# Altium PCB 3轴5.2-PCB-V3.3-2023.10.27.PcbDoc (part 2 of 2)
Units mm, origin at the board's own origin, x right, y up, seen from the top; angles counter-clockwise.
Board outline 152.4 x 101.6 mm, 2 copper layers (Top Layer, Bottom Layer); 198 components, 135 nets, 711 pads, 633 vias.
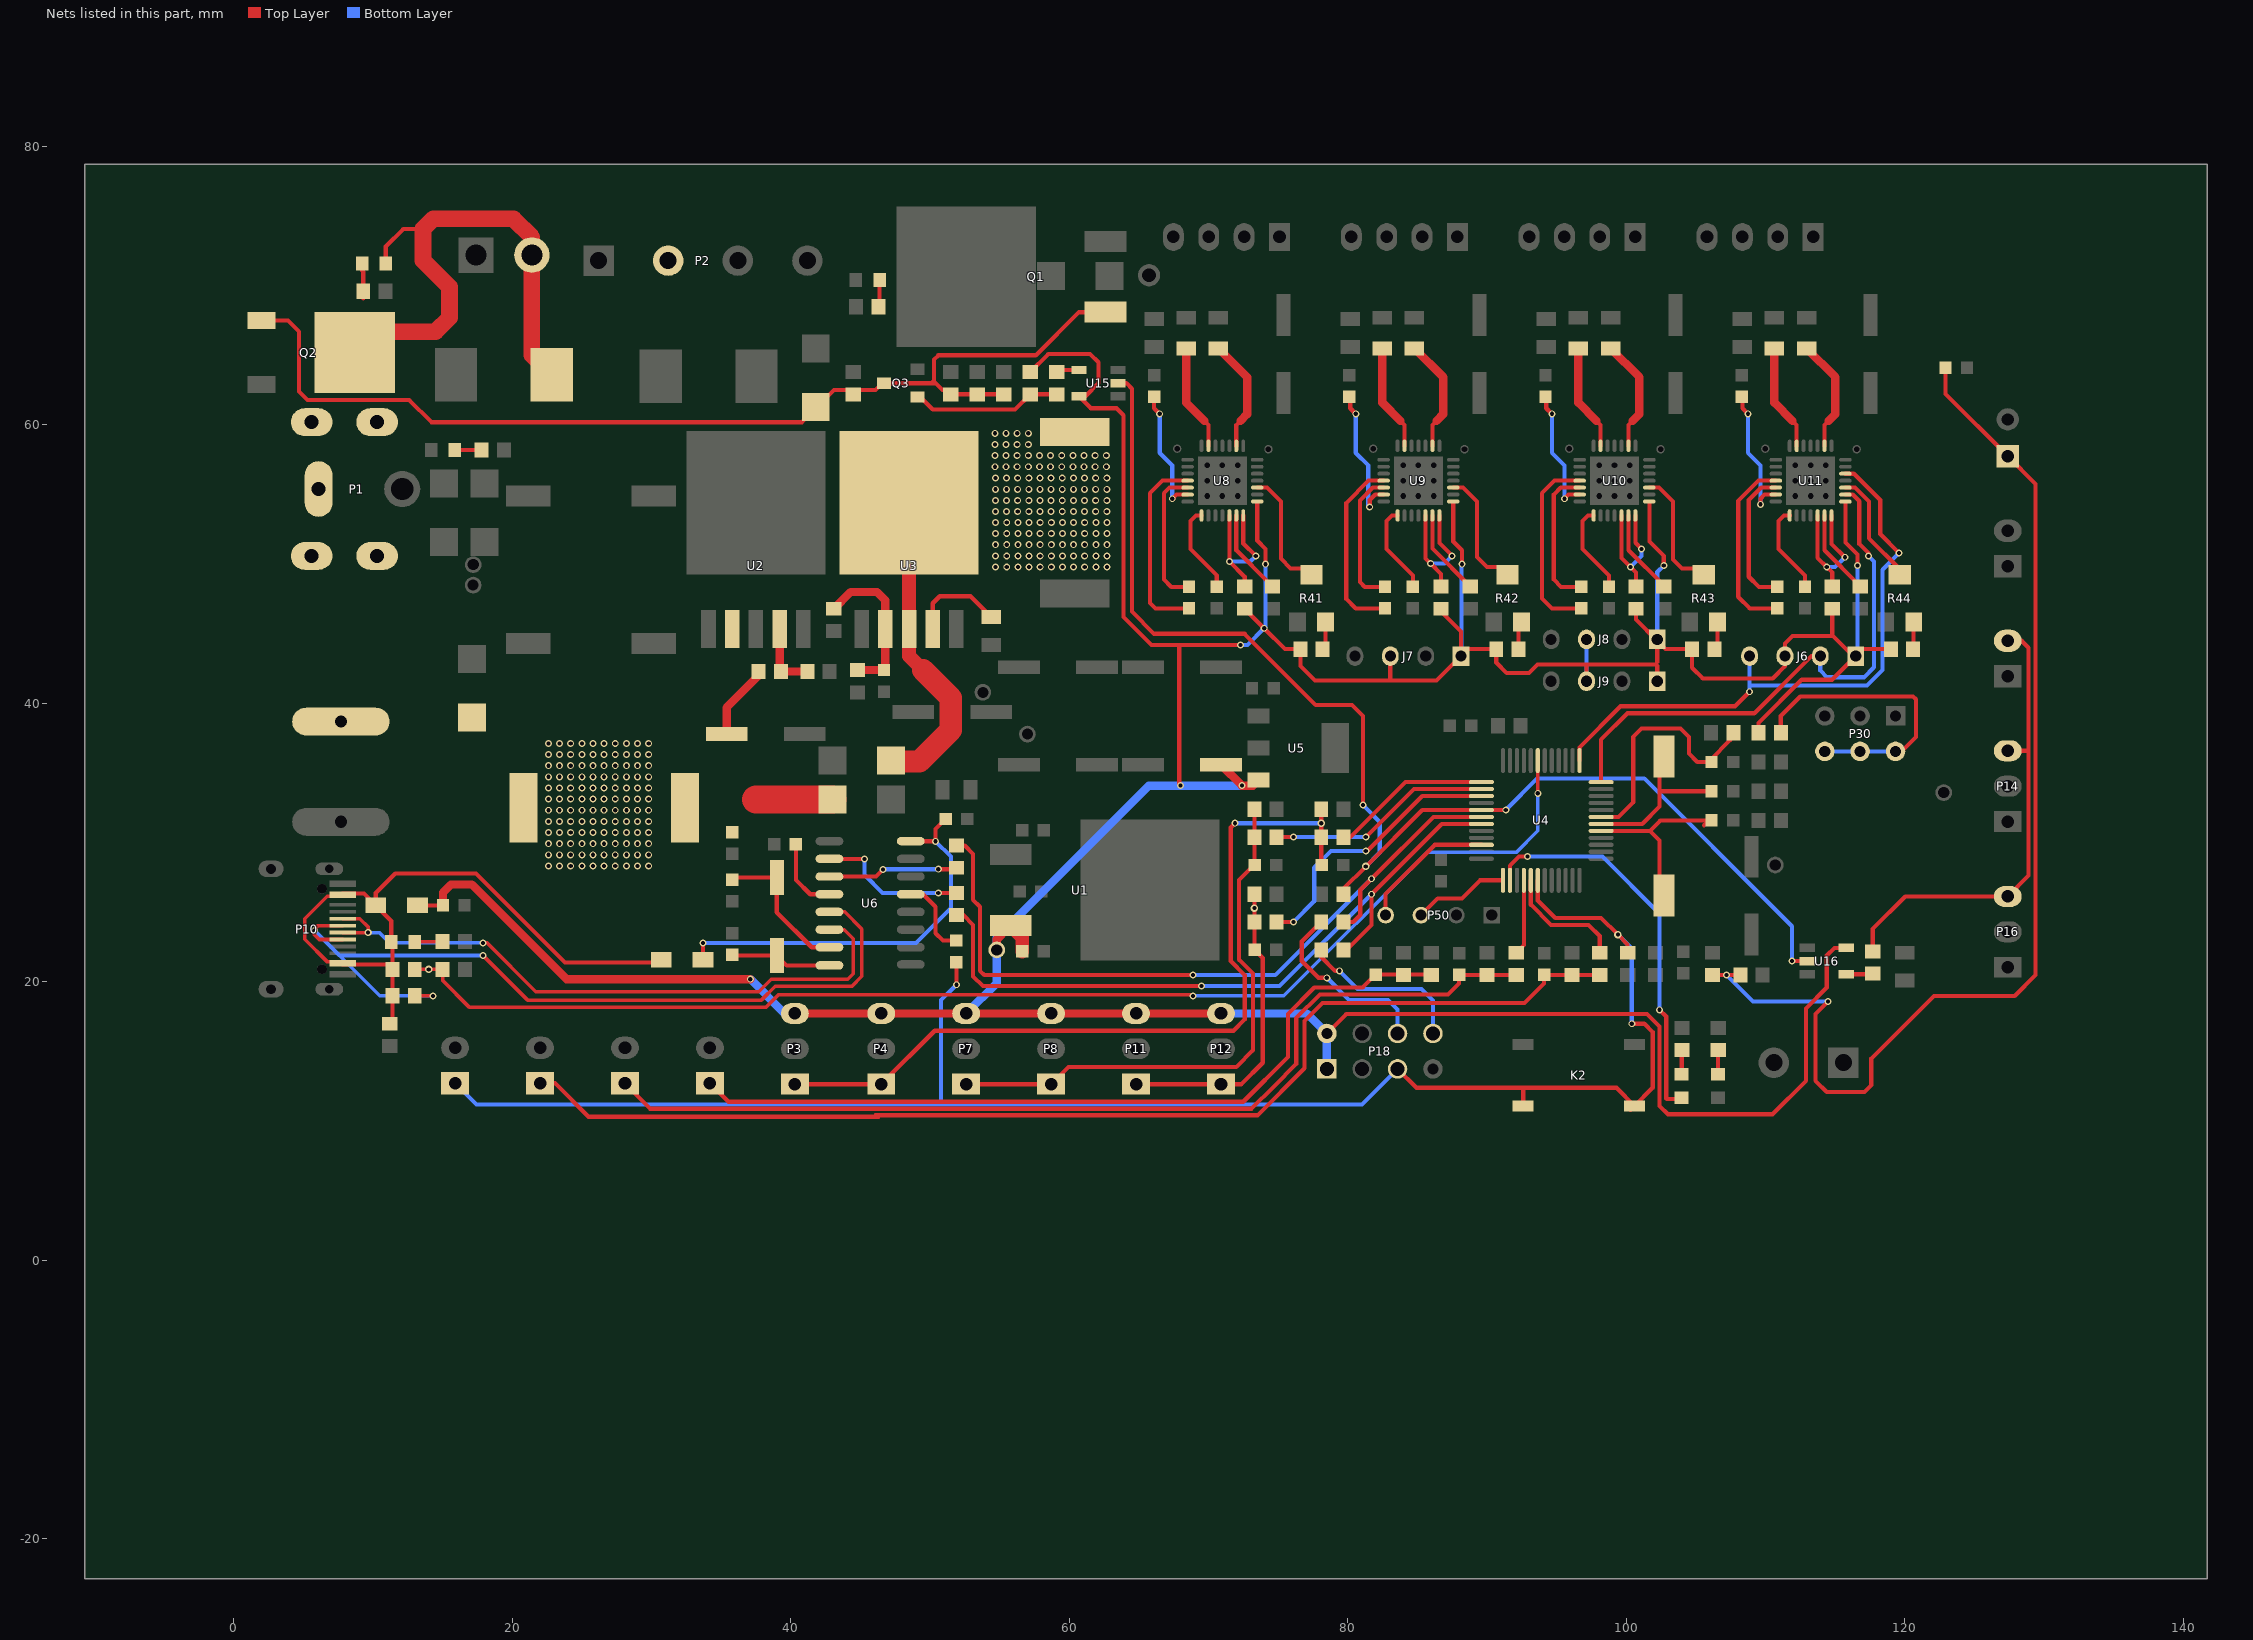
[diagram p2: the nets of this part, all layers, seen from the top]

## Via types
v1: diameter 0.5, hole 0.3, Top Layer to Bottom Layer, 619 vias
v2: diameter 0.53, hole 0.3, Top Layer to Bottom Layer, 14 vias

## Nets (pads, with @x,y where several pads share a name; then routed paths per layer and width w, separated by ;. In a path a pad name is that pad's centre, name@x,y a point inside that pad or via, vN(x,y) a via of type N, cw(c..) or ccw(c..) an arc to the next point about the centre after c; other vN are vias at no path point) (continued)
MZ_DIR: J6.4 U4.13 U11.19 | length 44.5
  Top Layer w0.3: U4.13@96.65,35.9 96.638,35.912 96.638,36.838 99.6,39.8 107.82,39.8 v1(108.86,40.84) ; U11.19@115.74,56.5 116.34,56.5 118.24,54.6 ; 118.24,54 118.24,54.6 ; v1(119.6,50.8) 118.24,52.16 118.24,54.6
  Bottom Layer w0.3: v1(108.86,40.84) 108.86,41.3 ; J6.4@108.86,43.4 108.86,41.3 ; v1(119.6,50.8) 118.4,49.6 118.4,42.4 117.3,41.3 108.86,41.3
MZ_STEP: J6.2 U4.12 U11.16 | length 40.8
  Top Layer w0.3: U4.12@98.2,34.35 98.2,37.4 100.1,39.3 109.2,39.3 113.3,43.4 J6.2@113.94,43.4 ; U11.16@115.74,54.999 116.265,54.999 116.74,54.524 ; 116.74,54 116.74,54.524 ; v1(117.4,50.6) 117.4,50.8 116.74,51.46 116.74,54.524
  Bottom Layer w0.3: J6.2@113.94,43.4 113.94,42.36 114.424,41.876 117.076,41.876 117.804,42.604 117.804,50.196 v1(117.4,50.6)
NetC4_1: C4.1 U3.4 | length 6.7
  Top Layer w0.3: U3.4@50.2,45.349 50.2,47.2 50.7,47.7 52.9,47.7 C4.1@54.3,46.3
NetC10_1: C10.1 C14.2 D7.1 L2.2 R6.2 | length 11
  Top Layer w0.6: C10.1@35.4,37.8 35.4,39.7 37.7,42 R6.2@37.7,42.3
  Top Layer w2: 37.5,33.1 D7.1@43,33.1
NetC17_2: C17.2 P3.1 P4.1 R11.1 R60.2 | length 59.1
  Top Layer w0.3: P3.1@40.3,12.66 P4.1@46.5,12.66 50.34,16.5 71.8,16.5 72.6,17.3 72.6,20.5 71.6,21.5 71.6,31.1 v1(71.9,31.4) ; R11.1@78.1,32.4 v2(78.1,31.4) 78.1,28.425 C17.2@78.125,28.4
  Bottom Layer w0.3: v1(71.9,31.4) v2(78.1,31.4)
NetC19_2: C19.2 D14.2 U6.16 | length 29
  Top Layer w0.3: D14.2@33.7,21.6 v1(33.7,22.8) ; U6.16@48.621,30.11 48.631,30.1 v1(50.4,30.1) 50.4,30.975 C19.2@51.125,31.7
  Bottom Layer w0.3: v1(33.7,22.8) 49,22.8 51.5,25.3 51.5,29 v1(50.4,30.1)
NetC20_2: C20.2 P7.1 P8.1 R14.1 R61.2 | length 39.8
  Top Layer w0.3: P7.1@52.6,12.66 P8.1@58.7,12.66 59.94,13.9 72,13.9 73.2,15.1 73.2,20.6 72.2,21.6 72.2,27.325 C20.2@73.3,28.425 ; R14.1@73.3,32.4 R61.2@73.3,30.4 C20.2@73.3,28.425 ; C20.2@73.325,28.4 C20.2@73.3,28.425
NetC23_1: C23.1 U6.4 | length 5.4
  Top Layer w0.3: C23.1@40.375,29.9 40.375,27.325 41.4,26.3 U6.4@42.779,26.3
NetC25_2: C25.2 P23.1 R90.1 R91.2 | length 83.2
  Top Layer w0.3: R91.2@106.2,20.5 v1(107.2,20.5) R90.1@108.2,20.5 ; v1(114.5,18.6) 113.6,17.7 113.6,12.9 114.4,12.1 117.1,12.1 117.6,12.6 117.6,14.5 122.1,19 127.9,19 129.4,20.5 129.4,55.76 P23.1@127.4,57.76 122.925,62.235 C25.2@122.925,64.1
  Bottom Layer w0.3: v1(107.2,20.5) 109.1,18.6 v1(114.5,18.6)
NetC26_2: C26.2 P11.1 P12.1 R19.1 R62.2 | length 22.1
  Top Layer w0.3: P11.1@64.8,12.66 P12.1@70.9,12.66 72.36,12.66 73.9,14.2 73.9,21.725 C26.2@73.325,22.3 73.3,22.325 R62.2@73.3,24.3 R19.1@73.3,26.3
  other v2: 73.3,25.3
NetC27_1: C27.1 U6.13 | length 5.8
  Top Layer w0.3: U6.13@48.621,26.3 49.5,26.3 50.4,25.4 50.4,23.5 50.925,22.975 C27.1@51.9,22.975
NetC38_1: C38.1 U8.4 | length 13.9
  Top Layer w0.3: U8.4@68.5,56 66.7,56 65.8,55.1 65.8,47.213 66.187,46.825 C38.1@68.6,46.825
NetC38_2: C38.2 U8.5 | length 10.1
  Top Layer w0.3: U8.5@68.5,55.5 67.2,55.5 66.8,55.1 66.8,48.9 67.325,48.375 C38.2@68.6,48.375
NetC39_1: C39.1 U9.4 | length 13.3
  Top Layer w0.3: U9.4@82.58,56 81.5,56 79.9,54.4 79.9,47.5 80.575,46.825 C39.1@82.68,46.825
NetC39_2: C39.2 U9.5 | length 9.9
  Top Layer w0.3: U9.5@82.58,55.5 81.8,55.5 80.88,54.58 80.88,48.72 81.225,48.375 C39.2@82.68,48.375
NetC40_1: C40.1 U10.4 | length 14
  Top Layer w0.3: 94.96,46.825 94.675,46.825 ; U10.4@96.66,56 94.86,56 93.96,55.1 93.96,47.54 94.675,46.825 ; C40.1@96.76,46.825 94.675,46.825
NetC40_2: C40.2 U10.5 | length 10.3
  Top Layer w0.3: U10.5@96.66,55.5 95.3,55.5 94.8,55 94.8,48.9 95.325,48.375 C40.2@96.76,48.375
NetC41_1: C41.1 U11.4 | length 13.3
  Top Layer w0.3: U11.4@110.74,56 109.5,56 108.04,54.54 108.04,47.66 108.875,46.825 C41.1@110.84,46.825
NetC41_2: C41.2 U11.5 | length 10.2
  Top Layer w0.3: U11.5@110.74,55.5 109.7,55.5 108.8,54.6 108.8,49.9 108.8,49.1 109.525,48.375 C41.2@110.84,48.375
NetC42_1: C42.1 U8.6 | length 9.3
  Top Layer w0.3: C42.1@66.1,62.125 66.1,61.2 v1(66.5,60.8) ; v1@67.5,54.7 v1(67.4,54.7) 67.699,54.999 U8.6@68.5,54.999
  Bottom Layer w0.3: v1(66.5,60.8) 66.5,58 67.4,57.1 v1(67.4,54.7)
NetC43_1: C43.1 U9.6 | length 10.5
  Top Layer w0.3: C43.1@80.18,62.125 80.18,61.2 v1(80.58,60.8) ; v1(81.58,54.1) 81.58,54.604 81.975,54.999 U9.6@82.58,54.999
  Bottom Layer w0.3: v1(80.58,60.8) 80.58,58 81.48,57.1 81.48,54.9 ; 81.48,54.7 81.48,54.9 ; v1(81.58,54.1) 81.48,54.2 81.48,54.9
NetC44_1: C44.1 U10.6 | length 9.3
  Top Layer w0.3: C44.1@94.26,62.125 94.26,61.2 v1(94.66,60.8) ; v1@95.66,54.7 v1(95.56,54.7) 95.859,54.999 U10.6@96.66,54.999
  Bottom Layer w0.3: v1(94.66,60.8) 94.66,58 95.56,57.1 v1(95.56,54.7)
NetC45_1: C45.1 U11.6 | length 10
  Top Layer w0.3: C45.1@108.34,62.125 108.34,61.2 v1(108.74,60.8) ; v1(109.64,54.3) 109.64,54.7 109.939,54.999 U11.6@110.74,54.999
  Bottom Layer w0.3: v1(108.74,60.8) 108.74,58 109.64,57.1 v1(109.64,54.3)
NetC46_1: C46.1 U8.8 | length 6.5
  Top Layer w0.3: U8.8@69.499,53.5 69.1,53.5 68.7,53.1 68.7,51.09 70.6,49.19 C46.1@70.6,48.375
NetC47_1: C47.1 U9.8 | length 6.4
  Top Layer w0.3: U9.8@83.579,53.5 83.18,53.5 82.78,53.1 82.78,51.09 84.68,49.19 ; C47.1@84.68,48.375 84.68,49.074
NetC48_1: C48.1 U10.8 | length 6.5
  Top Layer w0.3: U10.8@97.659,53.5 97.26,53.5 96.86,53.1 96.86,51.09 98.76,49.19 98.76,48.9 C48.1@98.76,48.375
NetC49_1: C49.1 U11.8 | length 6.4
  Top Layer w0.3: U11.8@111.739,53.5 111.34,53.5 110.94,53.1 110.94,51.09 112.84,49.19 ; C49.1@112.84,48.375 112.84,49.154
NetC54_1: C54.1 U6.7 Y1.2 | length 10.6
  Top Layer w0.3: C54.1@35.951,27.5 Y1.2@39,27.5 ; Y1.2@38.849,27.349 Y1.2@39,27.5 ; U6.7@42.779,22.49 41.51,22.49 39,25 Y1.2@39,27.5
NetC55_1: C55.1 U6.8 Y1.1 | length 7.3
  Top Layer w0.3: C55.1@35.8,22.025 35.925,21.9 Y1.1@39,21.9 39.71,21.19 U6.8@42.779,21.19
NetC56_1: C56.1 R1.1 R7.2 U3.2 | length 11.4
  Top Layer w0.6: R7.2@43.1,46.8 44.3,48 46.2,48 46.8,47.4 U3.2@46.8,45.349 46.8,42.5 C56.1@46.7,42.4 R1.1@44.8,42.4
NetC60_2: C60.2 P6.1 R63.2 R66.1 | length 84
  Top Layer w0.3: P6.1@22,12.73 23.07,12.73 25.478,10.322 46,10.322 ; 46.3,10.322 46,10.322 ; R63.2@98.1,20.5 R66.1@96.1,20.5 94.125,20.5 C60.2@94.1,20.525 94.1,19.9 92.7,18.5 78.2,18.5 76.9,17.2 76.9,13.8 73.522,10.422 46.1,10.422 46,10.322
NetC61_2: C61.2 P9.1 R64.2 R67.1 | length 71.1
  Top Layer w0.3: P9.1@28.1,12.73 28.1,12.7 29.9,10.9 73.1,10.9 74.7,12.5 76.3,14.1 76.3,17.4 78,19.1 87.2,19.1 88,19.9 C61.2@88,20.525 88.025,20.5 R67.1@90,20.5 R64.2@92.1,20.5
NetC62_2: C62.2 P13.1 R65.2 R68.1 | length 58
  Top Layer w0.3: P13.1@34.2,12.73 35.53,11.4 72.5,11.4 75.7,14.6 75.7,17.7 77.6,19.6 79.2,19.6 81.075,19.6 C62.2@82,20.525 85.975,20.525 R65.2@86,20.5
NetD4_1: D4.1 R3.2 | length 1.8
  Top Layer w0.3: D4.1@106.583,13.284 106.6,13.301 R3.2@106.6,15.1
NetD5_2: D5.2 L2.1 U2.2
  other v1: 22.6,28.332 23.4,28.332 24.2,28.332 25,28.332 25.8,28.332 26.6,28.332 27.4,28.332 28.2,28.332 29,28.332 29.8,28.332 22.6,29.132 23.4,29.132 24.2,29.132 25,29.132 25.8,29.132 26.6,29.132 27.4,29.132 28.2,29.132 29,29.132 29.8,29.132 22.6,29.932 23.4,29.932 24.2,29.932 25,29.932 25.8,29.932 26.6,29.932 27.4,29.932 28.2,29.932 29,29.932 29.8,29.932 22.6,30.732 23.4,30.732 24.2,30.732 25,30.732 25.8,30.732 26.6,30.732 27.4,30.732 28.2,30.732 29,30.732 29.8,30.732 22.6,31.532 23.4,31.532 24.2,31.532 25,31.532 25.8,31.532 26.6,31.532 27.4,31.532 28.2,31.532 29,31.532 29.8,31.532 22.6,32.332 23.4,32.332 24.2,32.332 25,32.332 25.8,32.332 26.6,32.332 27.4,32.332 28.2,32.332 29,32.332 29.8,32.332 22.6,33.132 23.4,33.132 24.2,33.132 25,33.132 25.8,33.132 26.6,33.132 27.4,33.132 28.2,33.132 29,33.132 29.8,33.132 22.6,33.932 23.4,33.932 24.2,33.932 25,33.932 25.8,33.932 26.6,33.932 27.4,33.932 28.2,33.932 29,33.932 29.8,33.932 22.6,34.732 23.4,34.732 24.2,34.732 25,34.732 25.8,34.732 26.6,34.732 27.4,34.732 28.2,34.732 29,34.732 29.8,34.732 22.6,35.532 23.4,35.532 24.2,35.532 25,35.532 25.8,35.532 26.6,35.532 27.4,35.532 28.2,35.532 29,35.532 29.8,35.532 22.6,36.332 23.4,36.332 24.2,36.332 25,36.332 25.8,36.332 26.6,36.332 27.4,36.332 28.2,36.332 29,36.332 29.8,36.332 22.6,37.132 23.4,37.132 24.2,37.132 25,37.132 25.8,37.132 26.6,37.132 27.4,37.132 28.2,37.132 29,37.132 29.8,37.132
NetD6_2: D6.2 L1.1 U3.3 | length 18.5
  Top Layer w1: U3.3@48.5,50.232 U3.3@48.5,45.349 48.5,43.4 49.5,42.4
  Top Layer w1.6: D6.2@47.3,35.835 49.235,35.835 51.5,38.1 51.5,40.4 49.5,42.4
  other v1: 54.714,49.8 55.514,49.8 56.314,49.8 57.114,49.8 57.914,49.8 58.714,49.8 59.514,49.8 60.314,49.8 61.114,49.8 61.914,49.8 62.714,49.8 54.714,50.6 55.514,50.6 56.314,50.6 57.114,50.6 57.914,50.6 58.714,50.6 59.514,50.6 60.314,50.6 61.114,50.6 61.914,50.6 62.714,50.6 54.714,51.4 55.514,51.4 56.314,51.4 57.114,51.4 57.914,51.4 58.714,51.4 59.514,51.4 60.314,51.4 61.114,51.4 61.914,51.4 62.714,51.4 54.714,52.2 55.514,52.2 56.314,52.2 57.114,52.2 57.914,52.2 58.714,52.2 59.514,52.2 60.314,52.2 61.114,52.2 61.914,52.2 62.714,52.2 54.714,53 55.514,53 56.314,53 57.114,53 57.914,53 58.714,53 59.514,53 60.314,53 61.114,53 61.914,53 62.714,53 54.7,53.782 55.5,53.782 56.3,53.782 57.1,53.782 57.9,53.782 58.7,53.782 59.5,53.782 60.3,53.782 61.1,53.782 61.9,53.782 62.7,53.782 54.7,54.582 55.5,54.582 56.3,54.582 57.1,54.582 57.9,54.582 58.7,54.582 59.5,54.582 60.3,54.582 61.1,54.582 61.9,54.582 62.7,54.582 54.7,55.382 55.5,55.382 56.3,55.382 57.1,55.382 57.9,55.382 58.7,55.382 59.5,55.382 60.3,55.382 61.1,55.382 61.9,55.382 62.7,55.382 54.7,56.182 55.5,56.182 56.3,56.182 57.1,56.182 57.9,56.182 58.7,56.182 59.5,56.182 60.3,56.182 61.1,56.182 61.9,56.182 62.7,56.182 54.664,57 55.464,57 56.264,57 57.064,57 57.864,57 58.664,57 59.464,57 60.264,57 61.064,57 61.864,57 62.664,57 54.664,57.8 55.464,57.8 56.264,57.8 57.064,57.8 57.864,57.8 58.664,57.8 59.464,57.8 60.264,57.8 61.064,57.8 61.864,57.8 62.664,57.8 54.664,58.6 55.464,58.6 56.264,58.6 57.064,58.6 54.664,59.4 55.464,59.4 56.264,59.4 57.064,59.4
NetD10_1: D10.1 R4.1 | length 1.9
  Top Layer w0.3: D10.1@15.884,58.217 15.901,58.2 R4.1@17.8,58.2
NetD12_1: D12.1 R71.1 | length 1.8
  Top Layer w0.3: D12.1@103.983,13.284 103.983,15.083 R71.1@104,15.1
NetD12_2: D12.2 U4.38 | length 28.4
  Top Layer w0.3: U4.38@91.65,27.3 91.65,28.35 92.3,29 v1(92.9,29) ; v1(102.4,18) 102.878,17.522 102.878,11.622 102.916,11.584 D12.2@103.983,11.584
  Bottom Layer w0.3: v1(92.9,29) 98.3,29 102.4,24.9 v1(102.4,18)
NetD13_2: D13.2 R76.2 | length 2
  Top Layer w0.254: D13.2@13.016,22.883 13.033,22.9 R76.2@15,22.9
NetD15_1: D15.1 R21.2 | length 2
  Top Layer w0.3: R21.2@46.3,68.5 46.384,68.584 D15.1@46.384,70.417
NetD16_1: D16.1 R58.2 | length 2
  Top Layer w0.3: D16.1@9.216,71.083 9.3,70.999 R58.2@9.3,69.1
NetD16_2: D16.2 DZ1.1 P17.2 Q2.2 | length 43.3
  Top Layer w0.3: D16.2@10.916,71.583 10.916,72.816 12.18,74.08 13.6,74.08
  Top Layer w1: 21.413,68.867 P17.2@21.413,72.2 P17.2@21.413,72.4
  Top Layer w1.2: Q2.2@8.7,64.6 10.8,66.7 14.5,66.7 15.5,67.7 15.5,69.9 13.6,71.8 13.6,74.08 14.32,74.8 20.1,74.8 21.413,73.487 P17.2@21.413,72.2 21.413,65.022 DZ1.1@22.835,63.6 ; Q2.2@8.7,65 Q2.2@8.7,65.961
NetDZ4_2: DZ4.2 Q1.1 Q2.1 Q3.2 R27.1 R57.1 R77.1 R78.1 | length 77.7
  Top Layer w0.3: Q2.1@2,67.5 3.9,67.5 4.7,66.7 4.7,62.4 5.3,61.8 12.6,61.8 14.2,60.2 34.4,60.2 ; 36.4,60.2 34.4,60.2 ; R27.1@51.5,62.2 R77.1@53.4,62.2 R78.1@55.3,62.2 ; R27.1@51.5,62.5 50.9,62.5 50.4,63 50.1,63 ; Q1.1@62.6,68.1 60.7,68.1 57.6,65 50.6,65 50.3,64.7 50.3,63.2 50.1,63 ; 34.4,60.2 40.8,60.2 41.9,61.3 43.1,62.5 44.7,62.5 46.1,62.5 46.6,63 46.9,63 50.1,63
NetK1_1: K1.1 P1.2 P1.3 P1.4 P1.5 P1.6 P2.2 | length 0.7
  Bottom Layer w0.3: P2.2@31.2,71.1 P2.2@31.2,71.8
NetP18_6: P18.6 R22.2 | length 13.4
  Top Layer w0.3: R22.2@78.1,24.3 76.7,22.9 76.7,21.5 77.9,20.3 v1(78.5,20.3)
  Bottom Layer w0.3: v1(78.5,20.3) 80.1,18.7 82.9,18.7 83.58,18.02 P18.6@83.58,16.3
NetP18_8: P18.8 R25.2 | length 12.2
  Top Layer w0.3: R25.2@78.1,22.3 78.1,21.8 79.1,20.8 v1(79.4,20.8)
  Bottom Layer w0.3: v1(79.4,20.8) 80.7,19.5 85.3,19.5 86.12,18.68 P18.8@86.12,16.3
NetP30_2: P30.2 P30.4 P30.6 R52.2 | length 21.2
  Top Layer w0.3: R52.2@111.1,37.9 111.1,38.1 111.1,39.1 112.5,40.5 114.6,40.5 120.6,40.5 120.8,40.3 120.8,37.6 119.76,36.56 P30.2@119.34,36.56
  Bottom Layer w0.3: P30.6@114.26,36.56 P30.4@116.8,36.56 P30.2@119.34,36.56
NetQ3_1: Q3.1 R80.2 R81.1 | length 13.6
  Top Layer w0.3: Q3.1@49.3,62 50.2,61.1 ; 53.2,61.1 50.2,61.1 ; R80.2@59.1,62.2 R81.1@57.2,62.2 56.1,61.1 50.2,61.1
NetR6_1: R6.1 R8.2 U2.4 | length 5
  Top Layer w0.6: U2.4@39.2,45.349 39.2,42.4 R6.1@39.3,42.3 R8.2@41.2,42.3
NetR15_1: R15.1 U6.2 | length 10.8
  Top Layer w0.3: U6.2@42.779,28.84 v1(45.3,28.84) ; v1(50.6,26.4) R15.1@51.9,26.4
  Bottom Layer w0.3: v1(45.3,28.84) 45.3,27.7 46.6,26.4 v1(50.6,26.4)
NetR16_1: R16.1 U6.3 | length 9.4
  Top Layer w0.3: U6.3@42.779,27.57 46.13,27.57 v1(46.638,28.078) ; v1(50.6,28.1) 51.8,28.1 R16.1@51.9,28.2
  Bottom Layer w0.3: v1(46.638,28.078) 46.66,28.1 v1(50.6,28.1)
NetR29_1: R29.1 U8.27 | length 7.7
  Top Layer w0.3: 69.7,60.3 69.999,60.001 U8.27@69.999,58.5
  Top Layer w0.6: R29.1@68.4,65.5 68.4,61.599 69.699,60.3
NetR30_2: R30.2 U8.23 | length 8.2
  Top Layer w0.3: U8.23@72.001,58.5 72.001,60.001 72.3,60.3
  Top Layer w0.6: R30.2@70.713,65.5 72.781,63.432 72.781,60.781 72.3,60.3
NetR31_1: R31.1 U9.27 | length 7.7
  Top Layer w0.3: 83.78,60.3 84.079,60.001 U9.27@84.079,58.5
  Top Layer w0.6: R31.1@82.48,65.5 82.48,61.599 83.779,60.3
NetR32_2: R32.2 U9.23 | length 8.2
  Top Layer w0.3: U9.23@86.081,58.5 86.081,60.001 86.38,60.3
  Top Layer w0.6: R32.2@84.793,65.5 86.861,63.432 86.861,60.781 86.38,60.3
NetR33_1: R33.1 U10.27 | length 7.7
  Top Layer w0.3: 97.86,60.3 98.159,60.001 U10.27@98.159,58.5
  Top Layer w0.6: R33.1@96.56,65.5 96.56,61.599 97.859,60.3
NetR34_2: R34.2 U10.23 | length 8.2
  Top Layer w0.3: U10.23@100.161,58.5 100.161,60.001 100.46,60.3
  Top Layer w0.6: R34.2@98.873,65.5 100.941,63.432 100.941,60.781 100.46,60.3
NetR35_1: R35.1 U11.27 | length 7.7
  Top Layer w0.3: 111.94,60.3 112.239,60.001 U11.27@112.239,58.5
  Top Layer w0.6: R35.1@110.64,65.5 110.64,61.599 111.939,60.3
NetR36_2: R36.2 U11.23 | length 8.2
  Top Layer w0.3: U11.23@114.241,58.5 114.241,60.001 114.54,60.3
  Top Layer w0.6: R36.2@112.953,65.5 115.021,63.432 115.021,60.781 114.54,60.3
NetR37_1: R37.1 R41.3 | length 2
  Top Layer w0.3: R37.1@78.2,43.9 78.4,44.1 R41.3@78.4,45.85
NetR38_1: R38.1 R42.3 | length 2
  Top Layer w0.3: R38.1@92.267,43.9 92.267,45.637 R42.3@92.48,45.85
NetR39_1: R39.1 R43.3 | length 2
  Top Layer w0.3: R39.1@106.333,43.9 106.56,44.127 R43.3@106.56,45.85
NetR40_1: R40.1 R44.3 | length 2
  Top Layer w0.3: R40.1@120.4,43.9 120.64,44.14 R44.3@120.64,45.85
NetR41_2: R41.2 U8.17 | length 8.9
  Top Layer w0.3: U8.17@73.5,55.5 74.2,55.5 75.2,54.5 75.2,50.4 75.9,49.7 76.95,49.7 R41.2@77.4,49.25
NetR42_2: R42.2 U9.17 | length 8.8
  Top Layer w0.3: U9.17@87.58,55.5 88.28,55.5 89.28,54.5 89.28,50.52 90,49.8 90.93,49.8 R42.2@91.48,49.25
NetR43_2: R43.2 U10.17 | length 9.2
  Top Layer w0.3: U10.17@101.66,55.5 102.36,55.5 103.36,54.5 103.36,53.3 103.36,50.34 104,49.7 105.56,49.7 R43.2@105.56,49.25
NetR44_2: R44.2 U11.17 | length 8.3
  Top Layer w0.3: U11.17@115.74,55.5 116.44,55.5 117.44,54.5 117.44,54.2 117.44,51.86 119.64,49.66 R44.2@119.64,49.25
NetR45_2: R45.2 U8.12 U8.14 | length 10.9
  Top Layer w0.3: U8.12@71.5,53.5 v1(71.5,50.2) 72.6,49.1 R45.2@72.6,48.4 ; U8.14@72.501,53.5 72.501,51.499 v1(73.4,50.6)
  Bottom Layer w0.3: v1(71.5,50.2) 73,50.2 v1(73.4,50.6)
NetR46_2: R46.2 U9.12 U9.14 | length 10.3
  Top Layer w0.3: U9.12@85.58,53.5 85.58,50.42 v1(85.96,50.04) 86.7,49.3 R46.2@86.7,48.4 ; U9.14@86.581,53.5 86.581,51.519 87.3,50.8
  Bottom Layer w0.3: v1(85.96,50.04) 86.94,50.04 v1(87.5,50.6)
NetR47_2: R47.2 U10.12 U10.14 | length 9.7
  Top Layer w0.3: U10.12@99.66,53.5 99.66,50.44 v1(100.3,49.8) 100.7,49.4 R47.2@100.7,48.4 ; U10.14@100.661,53.5 100.661,51.539 v1(101.1,51.1)
  Bottom Layer w0.3: v1(100.3,49.8) 101.1,50.6 v1(101.1,51.1)
NetR48_2: R48.2 U11.12 U11.14 | length 10.5
  Top Layer w0.3: U11.12@113.74,53.5 113.74,50.46 v1(114.4,49.8) 114.8,49.4 R48.2@114.8,48.4 ; U11.14@114.741,53.5 114.741,51.459 v1(115.7,50.5)
  Bottom Layer w0.3: v1(114.4,49.8) 115,49.8 v1(115.7,50.5)
NetR53_2: R53.2 U8.13 | length 6.2
  Top Layer w0.3: U8.13@72.001,53.5 72.001,50.999 74.35,48.65 R53.2@74.6,48.4
NetR54_2: R54.2 U9.13 | length 6.2
  Top Layer w0.3: U9.13@86.081,53.5 86.081,51.119 R54.2@88.8,48.4
NetR55_2: R55.2 U10.13 | length 6.2
  Top Layer w0.3: U10.13@100.161,53.5 100.161,50.999 102.7,48.46 R55.2@102.7,48.4
NetR56_2: R56.2 U11.13 | length 6.2
  Top Layer w0.3: U11.13@114.241,53.5 114.241,50.999 116.8,48.44 R56.2@116.8,48.4
NetR59_1: R59.1 U16.4 | length 1.9
  Top Layer w0.3: U16.4@115.8,20.55 117.65,20.55 R59.1@117.7,20.6
NetR80_1: R80.1 U15.4 | length 1.7
  Top Layer w0.3: R80.1@59.1,63.8 59.25,63.95 U15.4@60.7,63.95
NRST: C102.2 R104.2 U4.7 | length 17.6
  Top Layer w0.3: U4.7@98.2,31.85 99.45,31.85 100.5,32.9 100.5,37.6 101.1,38.2 103.9,38.2 104.5,37.6 104.5,36.4 105.1,35.8 C102.2@106.125,35.8 ; C102.2@106.013,35.913 107.5,37.4 R104.2@107.5,37.9
PROBE: R63.1 U4.41 | length 8.8
  Top Layer w0.3: U4.41@93.15,27.3 93.15,25.55 94.6,24.1 97.3,24.1 98.1,23.3 R63.1@98.1,22.1
PWM: P14.3 P16.3 P25.2 R59.2 | length 34
  Top Layer w0.3: R59.2@117.7,22.2 117.7,23.8 120.04,26.14 P16.3@127.4,26.14 128.9,27.64 128.9,36.6 ; P14.3@127.4,36.6 128.9,36.6 ; P25.2@127.4,44.5 128.4,44.5 128.9,44 128.9,36.6
RST: C27.2 K2.1 K2.3 P5.1 P18.5 R72.2 U4.42 | length 124.1
  Top Layer w0.3: v1(51.9,19.8) C27.2@51.9,21.425 ; P18.5@83.58,13.76 84.94,12.4 92.7,12.4 ; K2.3@92.6,11.1 92.6,12.3 92.7,12.4 ; U4.42@93.65,27.3 93.65,25.85 94.9,24.6 98.2,24.6 v2(99.4,23.4) 100.1,22.7 R72.2@100.1,22.1 ; K2.1@100.3,10.8 K2.1@100.6,11.1 ; v1(100.4,17) 101.3,17 101.9,16.4 101.9,12.4 K2.1@100.6,11.1 ; 92.7,12.4 99.3,12.4 K2.1@100.6,11.1
  Bottom Layer w0.3: P5.1@15.9,12.73 17.43,11.2 50.8,11.2 ; v1(51.9,19.8) 50.8,18.7 50.8,11.2 ; P18.5@83.58,13.76 81.02,11.2 50.8,11.2 ; v2(99.4,23.4) 100.4,22.4 v1(100.4,17)
RUN: R64.1 U4.40 | length 5.4
  Top Layer w0.3: R64.1@92.1,22.1 92.65,22.65 U4.40@92.65,27.3
RXD: R15.2 R25.1 U4.31 | length 51.8
  Top Layer w0.3: R15.2@51.9,24.8 52.4,24.8 53.1,24.1 53.1,20.4 53.8,19.7 v1(69.5,19.7) ; R25.1@79.7,22.3 79.9,22.3 81.7,24.1 v1(81.7,26.3) 86.75,31.35 U4.31@89.6,31.35
  Bottom Layer w0.3: v1(69.5,19.7) 75.1,19.7 v1(81.7,26.3)
SPINDLE_PWM: R70.2 U4.29 U15.2 U16.2 | length 92.4
  Top Layer w0.3: U15.2@63.5,63 64.1,63 64.5,62.6 64.5,46.6 66.1,45 72.6,45 77.7,39.9 80.3,39.9 81.1,39.1 v1(81.1,32.7) ; R70.2@79.7,26.3 79.7,26.7 v2(81.3,28.3) 85.35,32.35 U4.29@89.6,32.35 v1(91.35,32.35) ; v1(111.9,21.5) U16.2@113,21.5
  Bottom Layer w0.3: v1(81.1,32.7) 82.3,31.5 82.3,29.3 v2(81.3,28.3) ; v1(91.35,32.35) 93.6,34.6 101.3,34.6 111.07,24.83 111.9,24 v1(111.9,21.5)
SWCLK: P50.3 U4.37 | length 6.9
  Top Layer w0.3: P50.3@85.26,24.8 86.46,26 88.2,26 89.5,27.3 U4.37@91.15,27.3
SWDIO: P50.4 U4.34 | length 9.9
  Top Layer w0.3: P50.4@82.72,24.8 82.72,26.32 86.25,29.85 U4.34@89.6,29.85
TXD: R16.2 R22.1 U4.30 | length 55.2
  Top Layer w0.3: R16.2@51.9,29.8 52.5,29.8 53.1,29.2 53.1,25.9 53.6,25.4 53.6,20.8 53.9,20.5 v1(68.9,20.5) ; R22.1@79.7,24.3 80.4,24.3 80.9,24.8 80.9,26.6 v1(81.713,27.413) 86.15,31.85 U4.30@89.6,31.85
  Bottom Layer w0.3: v1(68.9,20.5) 74.8,20.5 v1(81.713,27.413)
USB-CHK: R74.2 R75.1 U4.19 | length 92.6
  Top Layer w0.254: R74.2@13,20.9 v2(14,20.9) R75.1@15,20.9 15,20.1 16.9,18.2 38.232,18.2 39.1,19.068 68.832,19.068 v1(68.9,19) ; v1(93.65,33.55) U4.19@93.65,35.9
  Bottom Layer w0.254: v1(68.9,19) 75.4,19 85.7,29.3 92.1,29.3 93.65,30.85 v1(93.65,33.55)
USB_DM: P10.A7 P10.B7 U6.6 | length 46
  Top Layer w0.254: P10.A7@7.815,23.55 v2(9.65,23.55) 9.65,23.95 9.05,24.55 P10.B7@7.815,24.55 ; v1(17.9,22.8) 18.2,22.8 21.7,19.3 37.7,19.3 38.6,20.2 44.1,20.2 44.5,20.6 44.5,23.1 43.84,23.76 U6.6@42.779,23.76
  Bottom Layer w0.254: v2(9.65,23.55) 10.45,23.55 11.2,22.8 v1(17.9,22.8)
USB_DP: P10.A6 P10.B6 R73.2 U6.5 | length 62.1
  Top Layer w0.254: P10.B6@7.815,23.05 6.15,23.05 5.8,23.4 v2(5.8,23.7) 5.8,23.8 6.05,24.05 P10.A6@7.815,24.05 ; R73.2@13,19 v1(14.3,19) ; v1(17.9,21.9) 21.1,18.7 37.9,18.7 38.9,19.7 44.4,19.7 45.1,20.4 45.1,23.8 43.87,25.03 U6.5@42.779,25.03
  Bottom Layer w0.254: v2(5.8,23.7) 7.6,21.9 v1(17.9,21.9) ; 7.65,21.85 10.5,19 v1(14.3,19)
VCC: C7.1 C9.2 C18.2 D9.2 J6.1 J6.3 J7.1 J7.3 J8.1 J8.3 J9.1 J9.3 P3.3 P4.3 P7.3 P8.3 P11.3 P12.3 P18.1 P18.2 pad.1@54.8,22.3 R37.2 R38.2 R39.2 R40.2 R45.1 R46.1 R47.1 R48.1 R52.1 R81.2 U1.3 U5.3 U8.15 U9.15 U10.15 U11.15 U15.5 U16.5 | length 339.3
  Top Layer w0.3: D9.2@13.2,25.5 C18.2@15.025,25.5 ; U1.3@55.8,24.06 U1.3@55.8,24.4 ; R81.2@57.2,63.8 58.5,65.1 61.5,65.1 62.1,64.5 62.1,63 61.15,62.05 U15.5@60.7,62.05 ; U15.5@60.7,62.05 61.55,61.2 63.4,61.2 63.9,60.7 63.9,46.2 65.9,44.2 67.9,44.2 ; v1(68,34.1) 67.9,34.2 67.9,44.2 ; v1(72.3,44.2) 67.9,44.2 ; R45.1@72.6,46.8 v1(74,45.4) 75.5,43.9 R37.2@76.6,43.9 76.6,42.7 77.66,41.64 86.38,41.64 J7.1@88.14,43.4 ; U8.15@73.5,54.4 73.5,51.7 74.1,51.1 v1(74.1,50) ; P18.2@78.5,16.3 79.9,17.7 101.5,17.7 102.4,16.8 102.4,11.1 103,10.5 110.5,10.5 112.9,12.9 112.9,18.1 114.4,19.6 114.4,21.9 114.95,22.45 U16.5@115.8,22.45 ; 83.06,41.66 J7.3@83.06,43.4 ; R46.1@86.7,46.8 86.7,46.6 88.14,45.16 J7.1@88.14,43.4 ; U9.15@87.58,54.4 87.58,51.62 88.2,51 v1(88.2,50) ; R38.2@90.7,43.867 R38.2@90.667,43.9 ; J9.3@97.15,41.6 J9.3@97.15,41.75 ; J9.3@97.3,41.6 J9.3@97.15,41.75 ; R47.1@100.7,46.8 100.7,46.03 J8.1@102.23,44.5 ; U10.15@101.66,54.4 101.66,51.64 102.7,50.6 v1(102.7,49.9) ; J8.1@101.96,44.5 J8.1@102.23,44.5 ; J9.1@102.18,41.4 102.23,41.45 J9.1@102.23,41.6 102.23,42.7 102.13,42.8 97.15,42.8 ; 102.23,42.976 J8.1@102.23,44.5 ; R52.1@109.5,37.7 R52.1@109.6,37.8 ; R52.1@109.5,37.9 109.5,38.6 112.6,41.7 114.78,41.7 J6.1@116.48,43.4 ; R48.1@114.8,46.8 114.8,44.88 114.84,44.84 ; U11.15@115.74,54.4 115.74,51.56 116.6,50.7 v1(116.6,49.9) ; R40.2@118.8,43.9 116.78,43.9 116.28,43.4 114.84,44.84 ; J7.1@88.14,43.4 88.64,43.9 R38.2@90.667,43.9 ; R38.2@90.667,43.9 90.667,42.933 91.415,42.185 93.015,42.185 93.63,42.8 97.15,42.8 ; J9.3@97.15,41.75 97.15,42.8 ; J8.1@102.23,44.5 102.83,43.9 R39.2@104.733,43.9 104.733,42.567 105.5,41.8 110.524,41.8 111.4,42.676 J6.3@111.4,43.4 111.4,44.3 111.94,44.84 114.84,44.84
  Top Layer w0.6: C18.2@15.025,25.5 15.025,26.425 15.6,27 17.1,27 23.9,20.2 v1(37.1,20.2) ; P3.3@40.3,17.74 P4.3@46.5,17.74 P7.3@52.6,17.74 P8.3@58.7,17.74 P11.3@64.8,17.74 P12.3@70.9,17.74 ; pad.1@54.8,22.3 54.8,23.06 55.54,23.8 U1.3@55.8,24.06 ; C7.1@70.9,35.6 v1(72.4,34.1) 73.2,34.1 U5.3@73.6,34.5
  Top Layer w1: U1.3@55.54,23.8 U1.3@55.56,23.8 ; U1.3@55.8,24.06 56.625,23.235 C9.2@56.625,22.2
  Bottom Layer w0.3: v1(72.3,44.2) 72.8,44.2 v1(74,45.4) ; v1@74.1,45.5 v1(74.1,50) ; J7.1@88.14,43.4 88.18,43.44 v1@88.18,50 ; J9.3@97.15,41.6 J8.3@97.15,44.6 ; J8.1@102.23,44.6 102.23,49.43 v1(102.7,49.9) ; J6.1@116.28,43.4 J6.1@116.34,43.46 ; J6.1@116.48,43.4 116.6,43.52 v1(116.6,49.9)
  Bottom Layer w0.6: v1(37.1,20.2) 39.56,17.74 P3.3@40.3,17.74 ; P7.3@52.6,17.74 54.8,19.94 pad.1@54.8,22.3 54.8,23.184 65.716,34.1 v1(68,34.1) v1(72.4,34.1) ; P12.3@70.9,17.74 77.06,17.74 P18.2@78.5,16.3 P18.1@78.5,13.76
VUSB: D9.1 D13.1 D14.1 P10.A4 P10.A9 P10.B4 P10.B9 R73.1 R74.1 R100.2 | length 49.5
  Top Layer w0.254: P10.B4@7.815,21.45 7.8,21.435 6.735,21.435 5.1,23.071 5.1,24.529 6.721,26.15 P10.B9@7.815,26.15
  Top Layer w0.3: P10.A9@7.815,21.25 11.05,21.25 R74.1@11.4,20.9 ; P10.A4@7.815,26.35 9.35,26.35 D9.1@10.2,25.5 ; R100.2@11.4,17.2 R73.1@11.4,19 R74.1@11.4,20.9 ; 29.1,21.4 27.5,21.4 ; D14.1@30.5,21.4 27.5,21.4 ; D9.1@10.2,25.5 10.2,26.4 11.6,27.8 17.4,27.8 23.8,21.4 27.5,21.4 ; D9.1@10.2,25.5 11.316,24.384 D13.1@11.316,22.883 11.4,22.799 R74.1@11.4,20.9
X_LIMT: R60.1 U4.25 | length 11.5
  Top Layer w0.3: R60.1@79.7,30.4 80.2,30.4 84.15,34.35 U4.25@89.6,34.35
XTAL1: C22.1 U4.5 Y2.1 | length 14.3
  Top Layer w0.3: U4.5@98.2,30.85 101.7,30.85 ; Y2.1@102.4,25.6 102.4,30.15 101.7,30.85 ; 105.575,31.25 C22.1@105.925,31.6 ; C22.1@106.125,31.6 C22.1@105.925,31.6 ; 101.7,30.85 102.45,31.6 C22.1@105.925,31.6
XTAL2: C21.1 U4.6 Y2.2 | length 11.5
  Top Layer w0.3: U4.6@98.2,31.35 101.15,31.35 102.4,32.6 102.4,33.8 ; Y2.2@102.4,35.6 102.4,33.8 ; C21.1@106.125,33.7 102.5,33.7 102.4,33.8
Y_LIMT: R61.1 U4.26 | length 16.1
  Top Layer w0.3: R61.1@74.9,30.4 v1(76.1,30.4) ; v1(81.3,30.4) 84.75,33.85 U4.26@89.6,33.85
  Bottom Layer w0.3: v1(76.1,30.4) v1(81.3,30.4)
Z_LIMT: R62.1 U4.27 | length 19.9
  Top Layer w0.3: R62.1@74.9,24.3 v1(76.1,24.3) ; v1(81.3,29.4) 81.4,29.4 85.35,33.35 U4.27@89.6,33.35
  Bottom Layer w0.3: v1(76.1,24.3) 77.6,25.8 77.6,28.2 78.8,29.4 v1(81.3,29.4)
pads on no net: P10. P10.A5 P10.A8 P10.B5 P10.B8 P18.7 U4.1 U4.2 U4.3 U4.4 U4.21 U4.22 U4.32 U4.33 U4.43 U4.45 U6.9 U6.10 U6.11 U6.12 U6.14 U6.15 U8.7 U8.20 U8.25 U9.7 U9.20 U9.25 U10.7 U10.20 U10.25 U11.7 U11.20 U11.25 U15.1 U16.1

## Polygon pours and split planes (outlines as drawn)
GND on Top Layer "Keep-Out Layer-No Net" (hatched 90Degree grid 0.05 track 0.1, remove dead copper, pour order 1017): -4.275,77.095 -4.275,6.595 132.825,6.595 132.825,76.795 -4.375,76.795
48V_SPN- on Top Layer "Keep-Out Layer-No Net" (hatched 90Degree grid 0.05 track 0.1, remove dead copper, pour order 1016): 58.9,71.7 57.6,71.7 51.6,71.7 47.7,75.6 39.1,75.6 38.5,75 37.9,74.4 37.9,70.9 33.2,66.2 33.2,62.1 33.2,61.7 33.8,61.1 39,61.1 39.1,61.2 39.8,61.9 39.8,68.8 39.8,69 41.3,70.5 42.5,71.7 47.2,71.7 58.9,71.7
NetD6_2 on Top Layer "Keep-Out Layer-No Net" (hatched 90Degree grid 0.05 track 0.1, remove dead copper, pour order 1015): 51.3,47.7 45.1,47.7 43.6,49.2 43.6,59.6 44.7,60.7 62.6,60.7 62.9,60.4 62.9,49.5 62.5,49.1 61.1,47.7 50.7,47.7
24V on Top Layer "Keep-Out Layer-No Net" (hatched 90Degree grid 0.08 track 0.2, remove dead copper, pour order 1021): 76.9,64.5 74.7,64.5 74,63.8 74,60.5 74.1,60.4 76.4,60.4 76.5,60.5 76.9,60.9 76.9,64.5
24V on Top Layer "Keep-Out Layer-No Net" (hatched 90Degree grid 0.08 track 0.2, remove dead copper, pour order 1023): 91.095,64.456 88.895,64.456 88.195,63.756 88.195,60.456 88.295,60.356 90.595,60.356 90.695,60.456 91.095,60.856 91.095,64.456
24V on Top Layer "Keep-Out Layer-No Net" (hatched 90Degree grid 0.08 track 0.2, remove dead copper, pour order 1025): 105.02,64.3 102.82,64.3 102.12,63.6 102.12,60.3 102.22,60.2 104.52,60.2 104.62,60.3 105.02,60.7 105.02,64.3
24V on Top Layer "Keep-Out Layer-No Net" (hatched 90Degree grid 0.08 track 0.2, remove dead copper, pour order 1026): 119.1,64.3 116.9,64.3 116.2,63.6 116.2,60.3 116.3,60.2 118.6,60.2 118.7,60.3 119.1,60.7 119.1,64.3
48V_IN on Top Layer "Keep-Out Layer-No Net" (hatched 90Degree grid 0.08 track 0.2, remove dead copper, pour order 1014): 15.506,53.394 19.006,53.394 19.4,53 19.4,48.2 18.9,47.7 14.9,47.7 14.4,48.2 13.914,48.686 13.914,52.1 13.914,52.56 14.554,53.2 14.73,53.376 15.524,53.376
48V1 on Top Layer "Keep-Out Layer-No Net" (hatched 90Degree grid 0.08 track 0.2, remove dead copper, pour order 1020): 13.914,56.7 22.272,56.7 23.253,55.7 30.758,48.05 33.913,48.05 34.6,47.35 34.6,46.6 33.815,45.8 33.111,45.8 25.574,45.8 23.024,43.2 22.926,43.1 19.688,43.1 19.198,43.6 19.198,47.112 19.884,47.812 19.884,52.594 19.878,52.6 19.878,53.32 19.407,53.8 19.015,54.2 14.698,54.2 14.461,54.2 13.9,54.772 13.9,56.686 13.914,56.7
NetC10_1 on Top Layer "Keep-Out Layer-No Net" (hatched 90Degree grid 0.05 track 0.1, remove dead copper, pour order 1013): 37.2,42.7 30.8,36.3 30.8,33.6 30.8,30.6 31.4,30 34.9,30 35.3,30.4 36.2,30.4 38,32.2 38,42.8 37.3,42.8 37.2,42.7
NetD5_2 on Top Layer "Keep-Out Layer-No Net" (hatched 90Degree grid 0.05 track 0.1, remove dead copper, pour order 1019): 25.3,41.1 14.9,41.1 13.9,40.1 13.9,32.7 18.4,28.2 20.5,26.1 28,26.1 29.1,26.1 30.3,27.3 30.3,36.4 31.9,38 36.4,42.5 36.4,44.7 35.5,44.7 35.3,44.5 35.3,43.3 33.1,41.1 25.3,41.1
GND on Bottom Layer "Keep-Out Layer-No Net" (hatched 90Degree grid 0.05 track 0.1, remove dead copper, pour order 1018): -3.961,77.5 134.239,77.5 134.239,7.1 -4.161,7.1 -4.161,77.3
NetD5_2 on Bottom Layer "Keep-Out Layer-No Net" (hatched 90Degree grid 0.05 track 0.1, remove dead copper, pour order 1024): 20.3,26.3 36.1,26.3 37.7,27.9 37.7,39.5 36.1,41.1 18.6,41.1 17.2,39.7 17.2,29.4 20.3,26.3
NetD6_2 on Bottom Layer "Keep-Out Layer-No Net" (hatched 90Degree grid 0.05 track 0.1, remove dead copper, pour order 1022): 55.6,41.3 49.1,41.3 43.5,47.554 43.5,62.183 44.5,63.3 63,63.3 63.3,62.965 63.3,43.422 61.9,41.858 61.4,41.3 55.6,41.3
NetK1_1 on Bottom Layer "Keep-Out Layer-No Net" (hatched 90Degree grid 0.08 track 0.2, remove dead copper, pour order 1027): 30.6,73.2 29.5,73.2 29.1,72.8 29.1,66 26.1,63 19.252,56.152 19.252,48.052 19.252,47.482 18.57,46.8 3.7,46.8 3.1,46.2 3.1,38.9 4.2,37.8 11.4,37.8 12.3,38.7 12.3,41.8 15.2,44.7 15.5,45 18.9,45 21.2,45 23.8,47.6 23.8,54.9 28.4,59.5 32.9,64 32.9,72.8 32.5,73.2 30.6,73.2
NetK1_1 on Bottom Layer "Keep-Out Layer-No Net" (hatched 90Degree grid 0.08 track 0.2, remove dead copper, pour order 1028): 14.3,46.8 14.3,48.5 11.1,51.7 9.3,53.5 9.3,56.5 9.3,56.6 10.6,57.9 11.9,59.2 11.9,60.6 11.3,61.2 4.9,61.2 4.2,61.2 3.8,60.8 3.8,58 4.5,57.3 4.5,52.1 3.5,51.1 3.1,50.7 3.1,46.052 13.552,46.052 14.3,46.8

## Keep-outs
Keep-Out Layer:
  circle w0.127: c125,5 r1.75
  circle w0.127: c125,81 r1.75
  circle w0.127: c5,81 r1.75
  circle w0.127: c106,56 r1.55
  circle w0.127: c4,72 r1.75
  circle w0.127: c4,14 r1.75
  circle w0.127: c126,14 r1.75
  circle w0.127: c126,72 r1.75
  circle w0.127: c5,5 r1.75
  circle w0.127: c78,56 r1.55
  lines w0.127: 0,5 ccw(c5,5) 5,0 125,0 ccw(c125,5) 130,5 130,81 ccw(c125,81) 125,86 5,86 ccw(c5,81) 0,81 0,5

## Other copper
Top Layer:
  rectangle net GND: 90.914,14.082 94.4,16.6

## Silkscreen, mask and mechanical layers (free items; w line width, h text height)
Top Overlay:
  circle w0.3: c113.25,32.16 r0.15
  circle w0.3: c113.25,31.26 r0.15
  circle w0.3: c113.25,28.87 r0.15
  circle w0.3: c113.25,29.77 r0.15
  circle w0.3: c113.25,26.48 r0.15
  circle w0.3: c113.25,27.38 r0.15
  circle w0.3: c113.25,24.09 r0.15
  circle w0.3: c113.25,24.99 r0.15
  circle w0.3: c115.65,29.77 r0.15
  circle w0.3: c115.65,28.87 r0.15
  circle w0.3: c114.45,27.38 r0.15
  circle w0.3: c114.45,26.48 r0.15
  circle w0.3: c114.45,24.99 r0.15
  circle w0.3: c114.45,24.09 r0.15
  circle w0.3: c115.65,24.99 r0.15
  circle w0.3: c115.65,24.09 r0.15
  lines w0.2: 12.35,8.136 12.35,10.2 ; 15.597,75.727 15.597,78 ; 15.9,8.7 15.9,6.5 12.35,6.5 12.35,8.8 18.138,8.8 18.138,10.186 ; 18.45,10.2 18.45,8.8 24.238,8.8 24.238,10.186 ; 19.6,75.727 19.6,77.2 ; 23.394,75.727 23.394,78 ; 23.736,75.864 23.736,78 ; 24.55,10.2 24.55,8.8 30.338,8.8 30.338,10.186 ; 28.8,75.864 28.8,77.2 ; 30.662,10.214 30.662,8.8 36.45,8.8 36.45,10.2 ; 33.8,75.864 33.8,77.2 ; 36.762,8.15 36.762,10.214 ; 38.8,75.864 38.8,77.2 ; 40.6,8.7 40.6,5.5 36.762,5.5 36.762,8.8 42.55,8.8 42.55,10.2 ; 42.962,10.214 42.962,8.8 48.75,8.8 48.75,10.2 ; 43.664,75.864 43.664,78 ; 49.062,10.214 49.062,8.8 54.85,8.8 54.85,10.2 ; 55.162,10.214 55.162,8.8 60.95,8.8 60.95,10.2 ; 61.262,10.214 61.262,8.8 67.05,8.8 67.05,10.2 ; 65.067,75.75 65.067,77.2 77.513,77.2 77.513,75.75 ; 67.362,10.214 67.362,8.8 73.15,8.8 73.15,10.2 ; 73.605,10.385 73.605,8.8 82.347,8.8 91.315,8.8 91.315,10.372 ; 77.847,75.75 77.847,77.2 90.293,77.2 90.293,75.75 ; 90.607,75.75 90.607,77.2 103.053,77.2 103.053,75.75 ; 93.612,10.514 93.612,8.8 99.6,8.8 99.6,10.514 ; 103.374,75.7 103.374,77.2 115.82,77.2 115.82,75.7 ; 108.132,10.214 108.132,8.8 118.064,8.8 118.064,10.136 ; 112.34,35.29 112.34,32.9 ; 116.6,35.29 116.6,32.9 ; 121.14,35.29 121.14,32.9 ; 123.814,29.072 121.75,29.072 121.75,39.06 123.814,39.06 ; 123.834,18.612 121.77,18.612 121.77,28.6 123.834,28.6 ; 123.864,39.418 121.8,39.418 121.8,47.018 123.864,47.018 ; 123.864,47.318 121.8,47.318 121.8,54.918 123.864,54.918 ; 123.914,55.3 121.85,55.3 121.85,62.9 123.914,62.9 ; 112.34,25.73 116.6,25.73 ; 112.34,25.73 112.34,28.12 ; 112.34,25.73 112.34,23.34 116.6,23.34 ; 112.34,28.12 116.6,28.12 ; 112.34,28.12 112.34,30.51 ; 112.34,30.51 112.34,32.9 ; 112.34,30.51 116.6,30.51 ; 112.34,32.9 116.6,32.9 ; 116.6,23.34 121.14,23.34 121.14,25.73 ; 116.6,23.34 116.6,25.73 ; 116.6,25.73 121.14,25.73 ; 116.6,25.73 116.6,28.12 ; 116.6,28.12 121.14,28.12 ; 116.6,28.12 116.6,30.51 ; 116.6,30.51 121.14,30.51 ; 116.6,30.51 116.6,32.9 ; 116.6,32.9 121.14,32.9 ; 121.14,25.73 121.14,28.12 ; 121.14,28.12 121.14,30.51 ; 121.14,30.51 121.14,32.9 ; 15.597,77.2 23.394,77.2 23.394,78.6 15.597,78.6 15.597,77.2 ; 23.736,77.2 43.664,77.2 43.664,78.6 23.736,78.6 23.736,77.2 ; 67,51.5 67,60.5 117,60.5 117,51.5 67,51.5 ; 102.8,8.8 108.1,8.8 108.1,10.1 102.8,10.1 102.8,8.8
  text "DC24V" at 17.7,77.5 h0.7
  text "DC48V" at 31.4,77.5 h0.7
  text "48V+" at 25,76.2 h0.7
  text "48V-" at 30.1,76.2 h0.7
  text "SPN+" at 35.1,76.2 h0.7
  text "SPN-" at 40.1,76.2 h0.7
  text "X-MOTOR" at 68.6,76.1 h0.7
  text "Y1-MOTOR" at 81,76.1 h0.7
  text "Y2-MOTOR" at 93.9,76.1 h0.7
  text "Z-MOTOR" at 107.4,76.1 h0.7
  text "SPN+" at 16.4,76 h0.7
  text "SPN-" at 20.4,75.9 h0.7
  text "DC24V" at 0.4,60.5 h0.7
  text "GND" at 123.4,59.9 h0.7 r90
  text "EX" at 123.4,56.9 h0.7 r90
  text "Z" at 120.3,50.3 h0.7
  text "-12V+" at 123.45,48.37 h0.7 r90
  text "Y1" at 93.3,47.252 h0.7
  text "Y2" at 107.3,47.172 h0.7
  text "X" at 79.2,47.012 h0.7
  text "MZ-EXP" at 107.8,45 h0.7
  text "MX-EXP" at 79.4,44.9 h0.7
  text "-DIR+" at 79.8,40.8 h0.7
  text "-PUL+" at 84.9,40.8 h0.7
  text "-DIR+" at 108.14,40.8 h0.7
  text "-PUL+" at 113.24,40.8 h0.7
  text "GND PWM" at 123.354,40.4 h0.7 r90
  text "-DIR+" at 93.89,39 h0.7
  text "-PUL+" at 98.99,39 h0.7
  text "MY-EXP" at 96.412,37.812 h0.7
  text "1/16" at 117.8,34.2 h0.7
  text "STEP" at 117.7,33.2 h0.7
  text "1/8" at 117.8,31.81 h0.7
  text "STEP" at 117.7,30.81 h0.7
  text "1/4" at 117.8,29.42 h0.7
  text "+12V-   PWM" at 123.3,29.4 h0.7 r90
  text "STEP" at 117.7,28.42 h0.7
  text "1/2" at 117.8,27.03 h0.7
  text "STEP" at 117.7,26.03 h0.7
  text "FULL" at 117.8,24.64 h0.7
  text "STEP" at 117.7,23.64 h0.7
  text "+24V- PWM" at 123.4,20.7 h0.7 r90
  text "LY-3axis-5.2-V3.3" at 21.8,18 h2
  text "Offline Plug" at 78.8,9.3 h0.7
  text "PROBE" at 19.7,9.2 h0.7
  text "Z+" at 63.5,9.2 h0.7
  text "Z-" at 69.6,9.2 h0.7
  text "RESET" at 95,9.2 h0.7
  text "RESET" at 13.7,9.1 h0.7
  text "RUN" at 26.5,9.1 h0.7
  text "HOLD" at 32.3,9.1 h0.7
  text "X+" at 39,9.1 h0.7
  text "X-" at 45.2,9.1 h0.7
  text "Y+" at 51.5,9.1 h0.7
  text "Y-" at 57.3,9.1 h0.7
  text "RUN" at 103.1,9.1 h0.7
  text "3V3" at 105.7,9.1 h0.7
  text "-DC24V+" at 110.6,9.1 h0.7
  text "+5V" at 37.2,7.8 h0.7
  text "GND" at 12.8,7.7 h0.7
  text "Ax" at 12.8,6.8 h0.7
  text "GND" at 37.2,6.8 h0.7
  text "S" at 37.8,5.8 h0.7
Mechanical 15:
  circle w0.127: c4,14 r3.5
  circle w0.127: c4,72 r3.5
  circle w0.127: c126,72 r3.5
  circle w0.127: c126,14 r3.5
  lines w0.127: 0,10 130,10 ; 0,76 130,76